# Altium PCB TG21_mach_nut_nhan _V1_ReV.PcbDoc (part 5 of 5)
Units mm, origin at the board's own origin, x right, y up, seen from the top; angles counter-clockwise.
Board outline 300 x 245 mm, 2 copper layers (Top Layer, Bottom Layer), stack 1.671 mm thick; 534 components, 407 nets, 1677 pads, 2608 vias.
Unrouted connection lines stored in the file: 3.
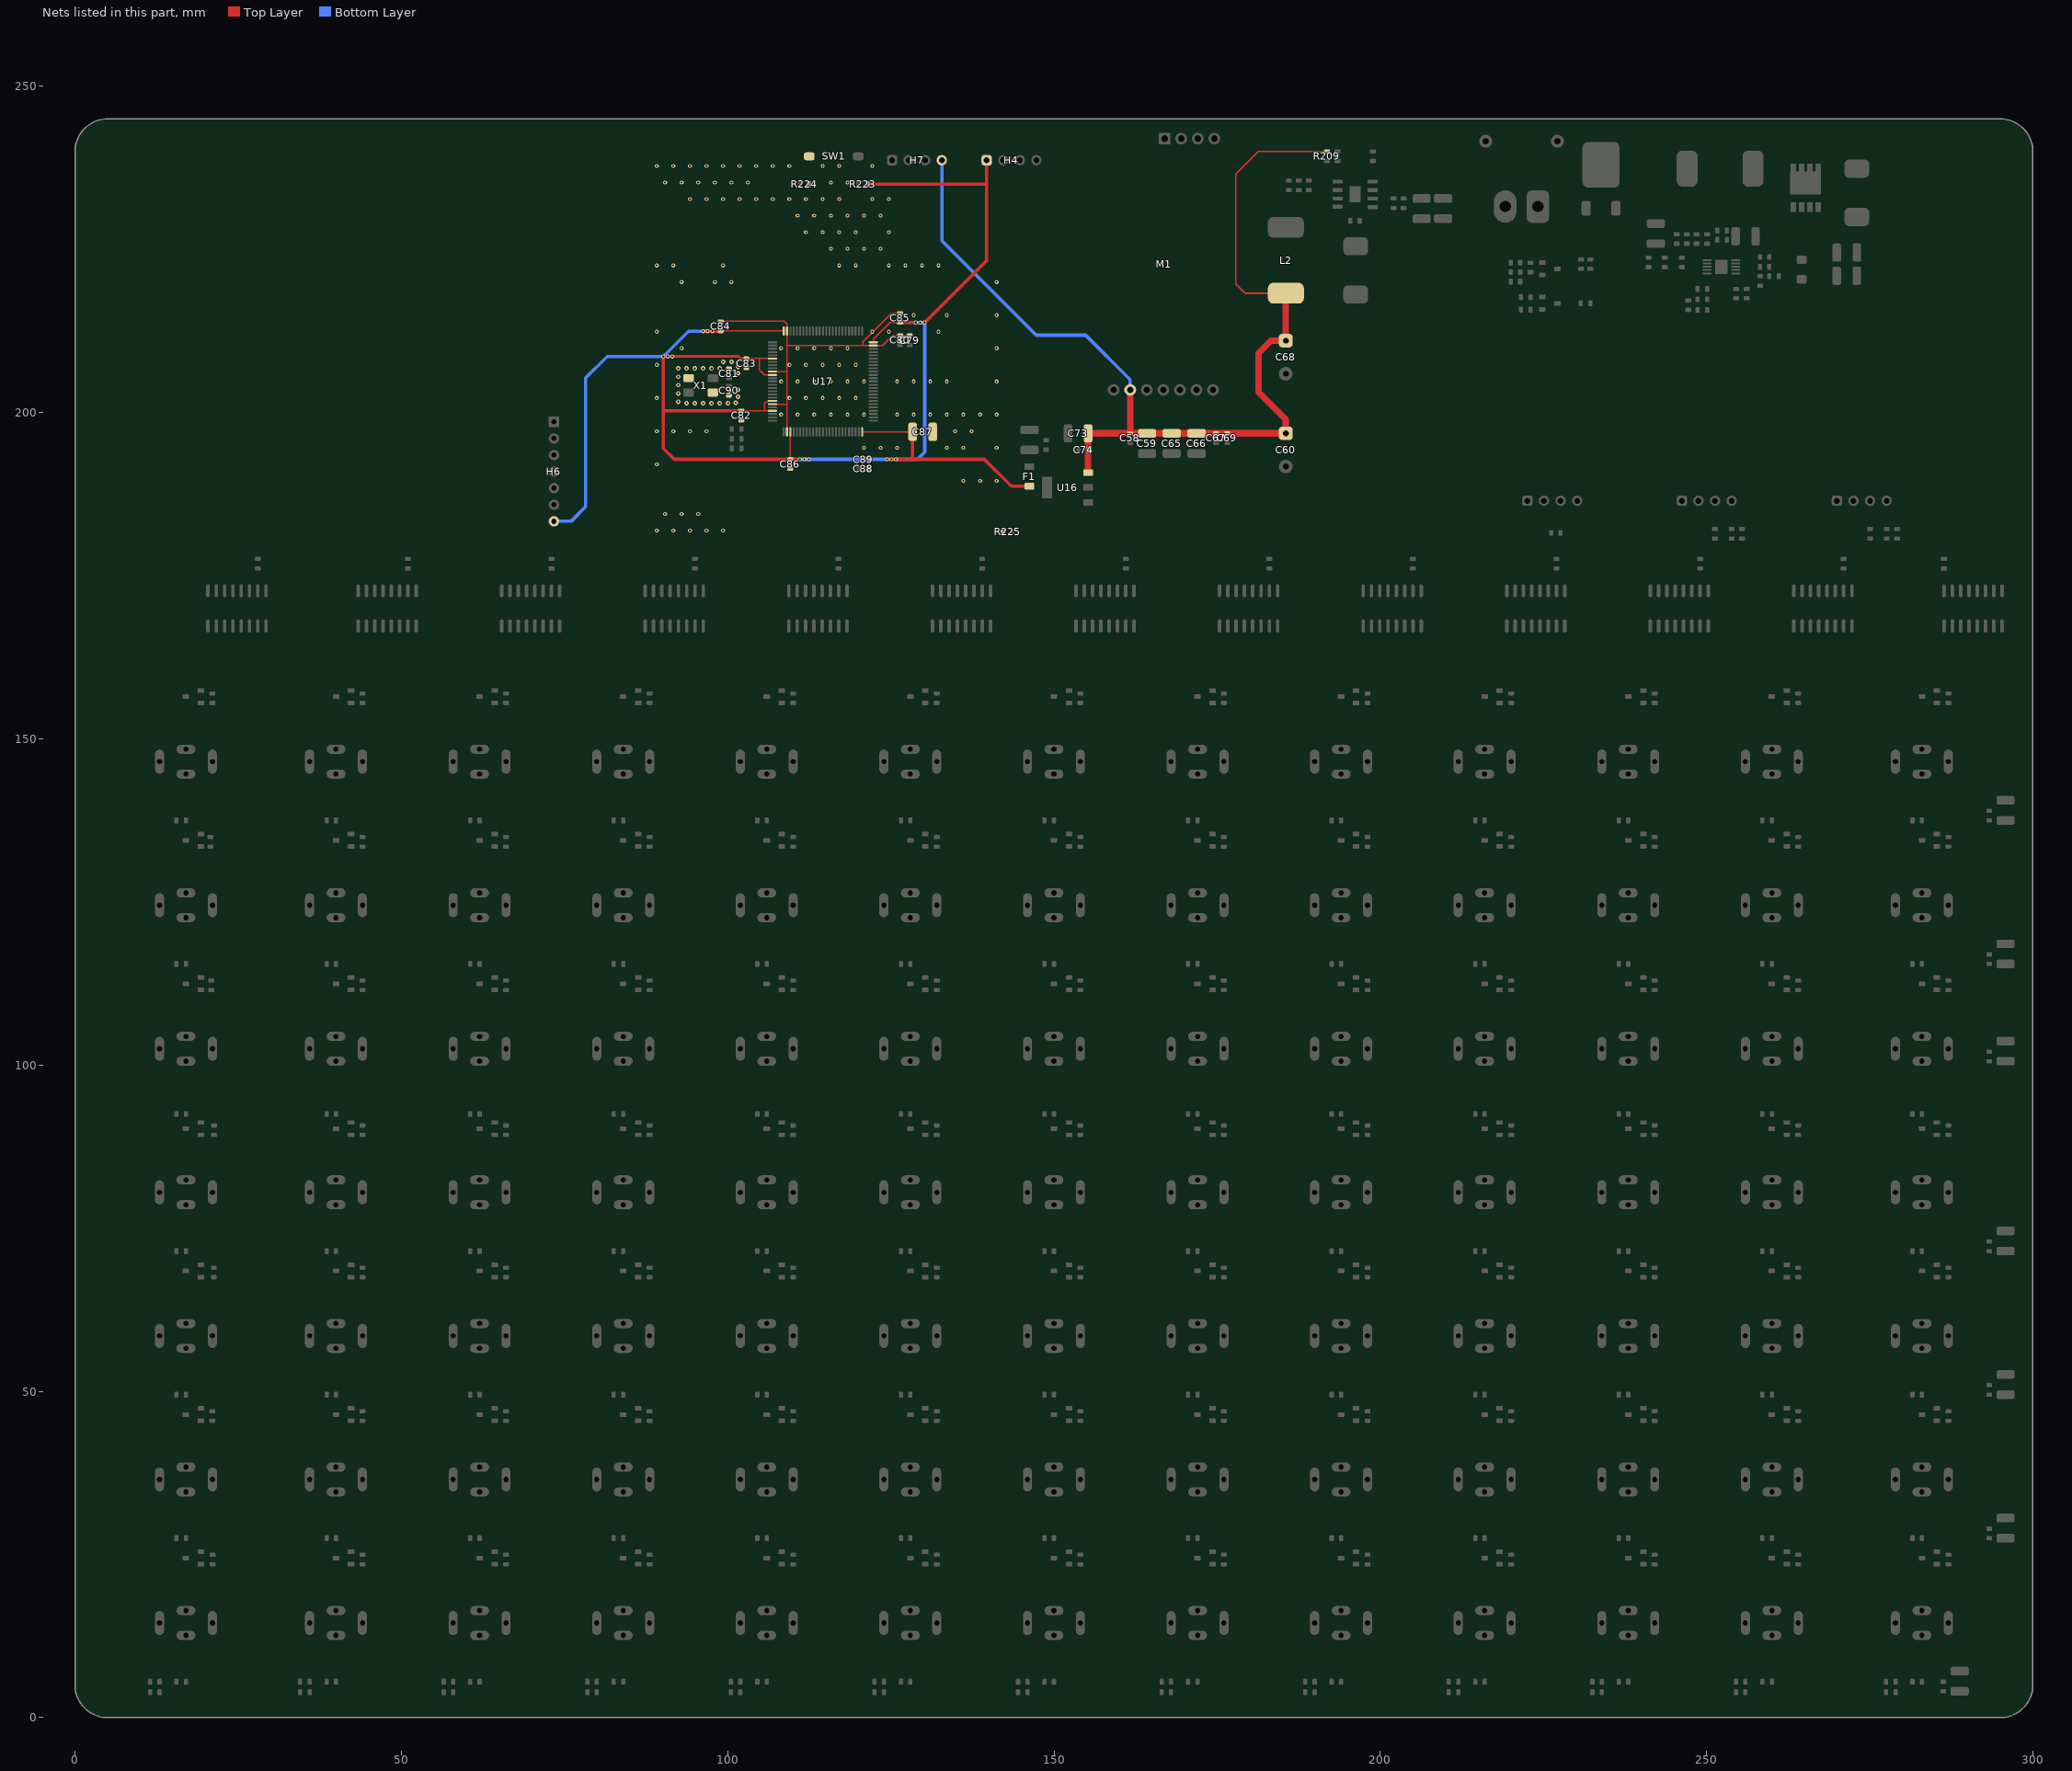
[diagram p5: the nets of this part, all layers, seen from the top]

## Via types
v1: diameter 0.6, hole 0.3, Top Layer to Bottom Layer, tented both sides, 2488 vias
v2: diameter 1.27, hole 0.711, Top Layer to Bottom Layer, tented both sides, 97 vias
v3: diameter 0.7, hole 0.3, Top Layer to Bottom Layer, tented both sides, 23 vias

## Nets (pads, with @x,y where several pads share a name; then routed paths per layer and width w, separated by ;. In a path a pad name is that pad's centre, name@x,y a point inside that pad or via, vN(x,y) a via of type N, cw(c..) or ccw(c..) an arc to the next point about the centre after c; other vN are vias at no path point) (continued)
VDDA: C82.2 C83.2 C84.2 C85.2 C86.2 C87.1 F1.2 H4.1 H6.7 R223.1 U17.6 U17.11 U17.19 U17.22 U17.28 U17.50 U17.75 U17.100 | length 269.7
  Top Layer w0.178: v1(90.145,208.585) v1@90.17,208.61 ; C84.2@98.933,212.5 U17.100@108.605,212.5 ; C82.2@102.097,200.275 105.664,200.275 ; C83.2@102.87,208.275 104.875,208.275 ; U17.22@106.88,200.275 105.664,200.275 ; U17.19@106.88,201.775 106.878,201.773 106.073,201.773 105.664,201.364 105.664,200.275 ; U17.11@106.88,205.775 105.655,205.775 104.875,206.554 104.875,208.275 ; U17.6@106.88,208.275 104.875,208.275 ; C86.2@109.605,192.837 U17.28@109.605,197.05 ; U17.75@122.33,210.775 122.33,211.23 124.878,213.778 C85.2@126.411,213.778
  Top Layer w0.2: U17.50@120.605,197.05 C87.1@128.346,197.05
  Top Layer w0.381: v1@90.17,208.61 101.637,208.61 101.972,208.275 C83.2@102.87,208.275
  Top Layer w0.508: v1(90.145,208.585) 90.145,200.275 ; v1(96.262,212.471) v1(96.952,212.471) ; v1@96.952,212.492 96.972,212.471 v1(97.643,212.471) 97.657,212.485 98.919,212.485 C84.2@98.933,212.5 ; C82.2@102.097,200.275 90.145,200.275 ; v1(111.074,192.837) C86.2@109.605,192.837 91.821,192.837 90.145,194.513 90.145,200.275 ; R223.1@121.456,235.001 139.686,235.001 139.7,234.987 ; v1(124.409,192.837) v1(125.095,192.837) v1(125.781,192.837) 128.346,192.837 ; C85.2@126.411,213.778 126.411,213.792 v1(128.829,213.792) v1@128.817,213.78 ; C87.1@128.346,196.596 128.346,192.837 ; v1(130.2,213.792) 139.7,223.291 139.7,234.987 ; H4.1@139.7,238.67 139.7,234.987 ; F1.2@146.254,188.719 143.463,188.719 139.344,192.837 128.346,192.837
  Bottom Layer w0.508: H6.7@73.387,183.337 76.022,183.337 78.257,185.572 78.257,205.308 81.534,208.585 88.773,208.585 89.459,208.585 v1(90.145,208.585) 94.031,212.471 v1(96.262,212.471) ; v1@96.283,212.471 v1(96.952,212.471) ; v1@96.972,212.471 v1(97.643,212.471) ; v1(111.074,192.837) v1(111.76,192.837) v1(112.446,192.837) v1(124.409,192.837) ; v1@125.933,192.837 129.108,192.837 130.2,193.929 v1@130.2,213.767 ; v1(128.829,213.792) v1(129.515,213.792) v1(130.2,213.792)
  other v1: 90.843,208.597 91.529,208.597
VOUT: C58.2 C59.2 C60.1 C65.2 C66.2 C67.2 C68.1 C69.2 C73.1 C74.2 H7.4 L2.2 M1.6 R209.2 U16.3 | length 161.3
  Top Layer w0.25: L2.2@185.547,218.292 179.294,218.292 177.876,219.71 177.876,236.576 181.318,240.018 R209.2@191.843,240.018
  Top Layer w1: U16.3@155.245,190.819 155.24,190.823 C74.2@155.24,194.283 C73.1@155.24,196.823 155.247,196.816 C58.2@161.68,196.816 ; M1.6@161.684,203.486 161.682,203.484 161.682,196.818 C58.2@161.68,196.816 ; L2.2@185.547,218.292 185.522,218.267 C68.1@185.522,211.023 183.261,211.023 181.366,209.128 181.366,203.139 185.522,198.984 C60.1@185.522,196.816 C69.2@176.562,196.816 C67.2@174.83,196.816 C66.2@171.855,196.816 C65.2@168.045,196.816 C59.2@164.27,196.816 C58.2@161.68,196.816
  Bottom Layer w0.5: H7.4@132.817,238.67 132.817,226.356 147.311,211.861 154.864,211.861 161.684,205.041 M1.6@161.684,203.486
VSSA: C79.1 C80.1 C81.2 C82.1 C83.1 C84.1 C85.1 C86.1 C87.2 C88.1 C89.1 C90.2 R224.1 R225.2 SW1.2 U17.10 U17.20 U17.27 U17.74 U17.99 X1.2 X1.4 | length 59
  Top Layer w0.178: C84.1@98.933,214.046 108.661,214.046 109.098,213.609 109.098,212.507 U17.99@109.105,212.5 109.105,210.261 ; C83.1@102.87,206.825 C83.1@102.995,206.825 ; U17.20@106.88,201.275 109.1,201.275 109.105,201.27 ; U17.10@106.88,206.275 109.101,206.275 109.105,206.279 ; U17.27@109.105,197.05 109.105,201.27 ; C85.1@126.411,215.228 125.109,215.228 120.735,210.854 120.735,210.275 ; C79.1@127.891,211.812 125.274,211.812 123.737,210.275 U17.74@122.33,210.275 120.735,210.275 ; 109.105,201.27 109.105,206.279 ; 109.105,206.279 109.105,210.261 ; 109.105,210.261 109.118,210.275 120.735,210.275
  other v1: 89.144,181.911 91.684,181.911 94.224,181.911 96.764,181.911 99.304,181.911 90.414,184.451 92.954,184.451 95.494,184.451 136.134,189.531 138.674,189.531 141.214,189.531 89.144,192.071 120.894,194.611 123.434,194.611 125.974,194.611 133.594,194.611 136.134,194.611 141.214,194.611 89.144,197.151 91.684,197.151 94.224,197.151 96.764,197.151 134.864,197.151 137.404,197.151 108.194,199.691 110.734,199.691 113.274,199.691 115.814,199.691 118.354,199.691 120.894,199.691 125.974,199.691 128.514,199.691 131.054,199.691 133.594,199.691 136.134,199.691 138.674,199.691 141.214,199.691 89.144,202.231 109.464,202.231 112.004,202.231 114.544,202.231 117.084,202.231 119.624,202.231 108.194,204.771 110.734,204.771 113.274,204.771 115.814,204.771 118.354,204.771 120.894,204.771 125.974,204.771 128.514,204.771 131.054,204.771 133.594,204.771 141.214,204.771 89.144,207.311 109.464,207.311 112.004,207.311 114.544,207.311 117.084,207.311 119.624,207.311 92.954,209.851 108.194,209.851 110.734,209.851 113.274,209.851 115.814,209.851 118.354,209.851 141.214,209.851 89.144,212.391 122.164,212.391 124.704,212.391 132.324,212.391 128.514,214.931 133.594,214.931 141.214,214.931 92.954,220.011 98.034,220.011 100.574,220.011 141.214,220.011 89.144,222.551 91.684,222.551 99.304,222.551 117.084,222.551 119.624,222.551 124.704,222.551 127.244,222.551 129.784,222.551 132.324,222.551 115.814,225.091 118.354,225.091 120.894,225.091 123.434,225.091 112.004,227.631 114.544,227.631 117.084,227.631 119.624,227.631 124.704,227.631 110.734,230.171 113.274,230.171 115.814,230.171 118.354,230.171 120.894,230.171 123.434,230.171 94.224,232.711 96.764,232.711 99.304,232.711 101.844,232.711 104.384,232.711 106.924,232.711 109.464,232.711 112.004,232.711 114.544,232.711 117.084,232.711 122.164,232.711 124.704,232.711 90.414,235.251 92.954,235.251 95.494,235.251 98.034,235.251 100.574,235.251 103.114,235.251 115.814,235.251 118.354,235.251 89.144,237.791 91.684,237.791 94.224,237.791 96.764,237.791 99.304,237.791 101.844,237.791 104.384,237.791 106.924,237.791 109.464,237.791 114.544,237.791 117.084,237.791 122.164,237.791
  other v3: 93.726,201.422 94.996,201.422 96.266,201.422 97.536,201.422 98.806,201.422 100.076,201.422 101.246,201.522 92.456,201.676 101.6,202.438 92.456,202.946 101.6,203.454 92.456,204.216 92.456,205.486 101.6,205.994 92.456,206.756 93.726,206.756 94.996,206.756 96.266,206.756 97.536,206.756 98.806,206.756 101.6,207.01 99.314,207.772 100.584,207.772
pads on no net: H5.0 U1.7 U2.7 U3.7 U4.7 U5.7 U6.7 U7.7 U8.7 U9.7 U10.7 U11.7 U12.7 U12.9 U13.7 U15.3 U17.21

## Polygon pours and split planes (outlines as drawn)
GND on Top Layer "NONET_L-01_P-001" (solid, pour order 18): 5,0 cw(c5,5) 0,5 0,240 cw(c5,240) 5,245 295,245 cw(c295,240) 300,240 300,5 cw(c295,5) 295,0
VSSA on Top Layer "NONET_L-01_P-001" (solid, pour order 1): 86.512,240.569 125.096,240.569 125.092,223.235 142.627,223.204 142.621,180.772 104.497,180.772 86.512,180.772
GND on Bottom Layer "NONET_L-01_P-001" (solid, pour order 17): 5,0 cw(c5,5) 0,5 0,240 cw(c5,240) 5,245 295,245 cw(c295,240) 300,240 300,5 cw(c295,5) 295,0
VSSA on Bottom Layer "NONET_L-01_P-001" (solid, pour order 6): 86.513,240.574 125.097,240.574 125.093,223.239 142.627,223.208 142.622,180.776 104.498,180.776 86.513,180.776

## Keep-outs
Keep-Out Layer:
  circle w0.102: c205,221.6 r1.75
  circle w0.102: c5,221.6 r1.75
  circle w0.102: c95,221.6 r1.75
  circle w0.102: c295,221.6 r1.75
  circle w0.102: c5,91.5 r1.75
  circle w0.102: c5,5 r1.75
  circle w0.102: c95,5 r1.75
  circle w0.102: c205,5 r1.75
  circle w0.102: c295,5 r1.75
  circle w0.102: c295,91.5 r1.75
  circle w0.102: c205,91.5 r1.75
  circle w0.102: c95,91.5 r1.75
  lines w0.254: 0,0 5.216,0 ; 67,204.323 67,210.5 ccw(c65,210.5) 65,212.5 37,212.5 ccw(c37,210.5) 35,210.5 35,182.5 ccw(c37,182.5) 37,180.5 65,180.5 ccw(c65,182.5) 67,182.5 67,204.595 ; 220,200.1 220,208.73 ; 220,204.077 220,208.83 cw(c221.27,208.83) 221.27,210.1 278.73,210.1 ; 220,206.454 220,191.37 ccw(c221.27,191.37) 221.27,190.1 278.73,190.1 ; 221.454,190.1 278.73,190.1 ; 221.454,210.1 278.73,210.1 ; 278.73,190.1 ccw(c278.73,191.37) 280,191.37 280,208.83 ccw(c278.73,208.83) 278.73,210.1 ; 0,5 ccw(c5,5) 5,0 6.973,0 295,0 ccw(c295,5) 300,5 300,240 ccw(c295,240) 295,245 5,245 ccw(c5,240) 0,240 0,5

## Other copper
Top Layer:
  pour cut-out: 178.764,226.128 178.764,227.66 cw(c181.304,227.66) 181.304,230.2 189.967,230.2 cw(c189.967,227.889) 192.278,227.889 192.278,218.872 cw(c189.738,218.872) 189.738,216.332 180.487,216.332 cw(c180.487,218.055) 178.764,218.055
  pour cut-out: 244.78,238.887 244.78,241.732 cw(c247.32,241.732) 247.32,244.272 256.87,244.272 cw(c256.87,241.732) 259.41,241.732 259.41,233.096 cw(c256.87,233.096) 256.87,230.556 247.117,230.556 cw(c247.117,232.842) 244.831,232.842
  region net BAT_EN: 198.086,232.554 198.139,232.501 199.546,232.501 199.906,232.141 210.841,232.141 211.034,232.334 211.034,233.131 213.336,235.433 229.54,235.433 230.494,234.478 236.177,234.478 236.677,234.978 236.677,240.978 236.177,241.478 231.487,241.478 229.556,239.547 210.82,239.547 204.724,233.451 199.897,233.451 199.546,233.101 198.139,233.101 198.086,233.048 198.086,233.011
  region net BAT_EN: 247.991,234.478 248.62,235.107 248.62,240.762 247.903,241.478 231.487,241.478 230.987,240.978 230.987,234.978 231.487,234.478 232.033,234.478
  region net BAT+: 225.373,234.079 225.904,233.549 225.904,230.559 227.66,228.803 233.375,228.803 235.417,230.845 235.417,232.233 235.622,232.438 236.612,232.438 236.817,232.233 236.817,230.353 236.817,227.724 234.899,225.806 223.876,225.806 222.404,227.278 222.404,233.567 222.917,234.079 223.279,234.079
  region net NetC61_1: 194.146,231.851 194.173,231.824 194.21,231.824 195.725,230.309 195.725,228.898 198.14,226.483 198.14,224.503 197.73,224.093 194.75,224.093 194.34,224.503 194.34,226.068 193.616,226.792 183.266,226.792 182.797,227.261 182.797,229.524 185.124,231.851 192.776,231.851
  region net VDDA: 89.852,208.597 cw(c90.157,208.597) 90.157,208.902 91.529,208.902 cw(c91.529,208.597) 91.834,208.597 cw(c91.529,208.597) 91.529,208.293 90.157,208.293 cw(c90.157,208.597)
  region net BAT_EN: 252.782,226.13 252.878,226.035 253.534,226.035 253.974,225.595 254.907,225.595 255.101,225.788 255.101,228.211 254.907,228.405 253.017,228.405 252.945,228.332 252.878,228.332 252.782,228.237 252.782,228.17
  region net NetQ92_1: 262.862,232.225 266.252,232.225 266.252,230.775 266.252,223.846 265.176,222.77 263.957,222.77 262.862,223.865 262.862,230.775
  region net +24VDC: 274.925,226.833 273.685,225.593 273.685,219.75 273.491,219.557 272.695,219.557 272.365,219.887 272.365,225.593 271.125,226.833 271.125,230.978 271.535,231.388 274.515,231.388 274.925,230.978
  region net NetD1_1: 255.52,239.539 255.754,239.774 255.754,239.904 255.988,240.138 273.165,240.138 274.925,238.378 274.925,236.398 271.956,233.43 257.197,233.43 255.52,235.107 255.52,235.438
  region net VDDA: 110.769,192.837 cw(c111.074,192.837) 111.074,193.142 112.446,193.142 cw(c112.446,192.837) 112.751,192.837 cw(c112.446,192.837) 112.446,192.532 111.074,192.532 cw(c111.074,192.837)
  region net VDDA: 124.104,192.837 cw(c124.409,192.837) 124.409,193.142 125.781,193.142 cw(c125.781,192.837) 126.086,192.837 cw(c125.781,192.837) 125.781,192.532 124.409,192.532 cw(c124.409,192.837)
  region net VDDA: 128.524,213.792 cw(c128.829,213.792) 128.829,214.097 130.2,214.097 cw(c130.2,213.792) 130.505,213.792 cw(c130.2,213.792) 130.2,213.487 128.829,213.487 cw(c128.829,213.792)
  region net NetC75_2: 155.994,189.014 155.448,189.56 150.407,189.56 149.244,190.723 149.244,194.549 149.149,194.645 148.869,194.925 145.043,194.925 144.849,194.731 144.849,193.798 145.504,193.143 145.504,191.306 145.592,191.219 145.899,191.219 147.574,189.544 147.574,187.249 147.942,186.88 149.99,186.88 150.409,187.3 155.499,187.3 155.994,187.795 155.994,188.023
Bottom Layer:
  region net VDDA: 89.852,208.597 cw(c90.157,208.597) 90.157,208.902 91.529,208.902 cw(c91.529,208.597) 91.834,208.597 cw(c91.529,208.597) 91.529,208.293 90.157,208.293 cw(c90.157,208.597)
  region net VDDA: 110.769,192.837 cw(c111.074,192.837) 111.074,193.142 112.446,193.142 cw(c112.446,192.837) 112.751,192.837 cw(c112.446,192.837) 112.446,192.532 111.074,192.532 cw(c111.074,192.837)
  region net VDDA: 124.104,192.837 cw(c124.409,192.837) 124.409,193.142 125.781,193.142 cw(c125.781,192.837) 126.086,192.837 cw(c125.781,192.837) 125.781,192.532 124.409,192.532 cw(c124.409,192.837)
  region net VDDA: 128.524,213.792 cw(c128.829,213.792) 128.829,214.097 130.2,214.097 cw(c130.2,213.792) 130.505,213.792 cw(c130.2,213.792) 130.2,213.487 128.829,213.487 cw(c128.829,213.792)

## Silkscreen, mask and mechanical layers (free items; w line width, h text height)
Mechanical 1:
  drawing of 242 lines, arcs and shapes, not listed
Mechanical 3:
  drawing of 839 lines, arcs and shapes, not listed

## Text inside footprints (layer, text, board x,y; h text height)
M1: Bottom Overlay "GND" at 166.383,236.943 h1.8 r270; Bottom Overlay "GND" at 174.003,236.943 h1.8 r270; Bottom Overlay "GND" at 171.368,236.912 h1.8 r270; Bottom Overlay "GND" at 168.955,236.912 h1.8 r270; Bottom Overlay "GND" at 158.604,205.549 h1.8 r270; Bottom Overlay "VCC" at 161.144,205.549 h1.8 r270; Bottom Overlay "AUX" at 163.684,205.549 h1.8 r270; Bottom Overlay "TXD" at 166.224,205.549 h1.8 r270; Bottom Overlay "RXD" at 168.764,205.549 h1.8 r270; Bottom Overlay "M0" at 173.844,205.549 h1.8 r270; Bottom Overlay "ANT" at 159.194,240.316 h1.8 r270; Bottom Overlay "E32(433T30D)" at 165.621,215.932 h2.8 r270